# EAGLE board main_board (EAGLE 9.5.2)
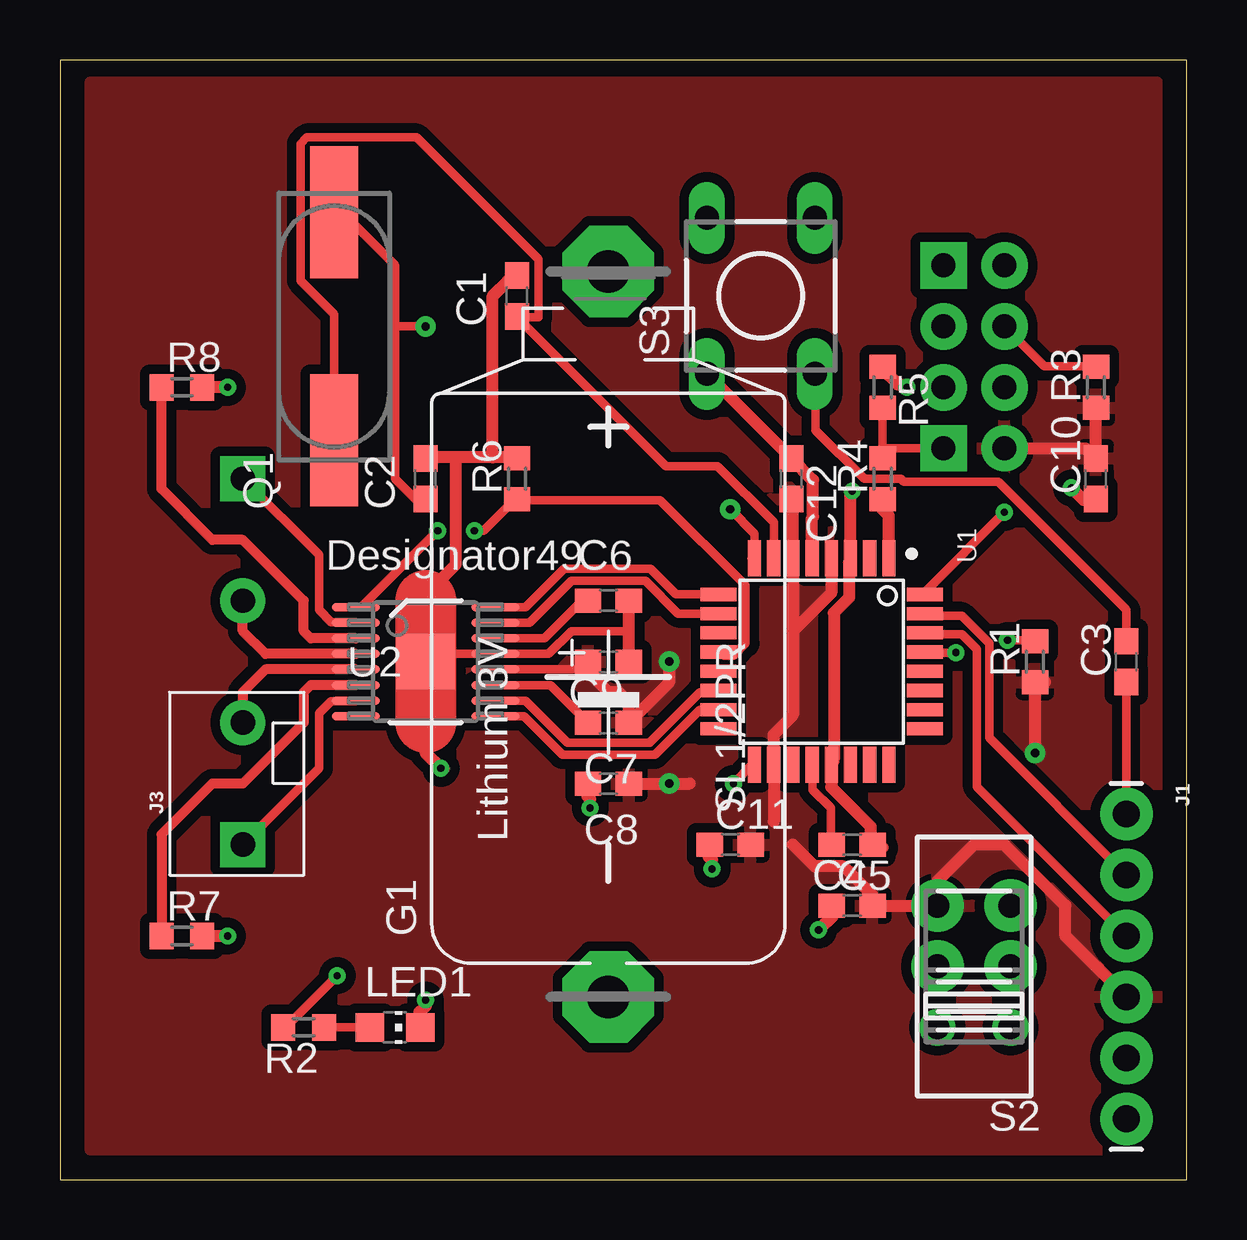
[diagram p0: board, top side]
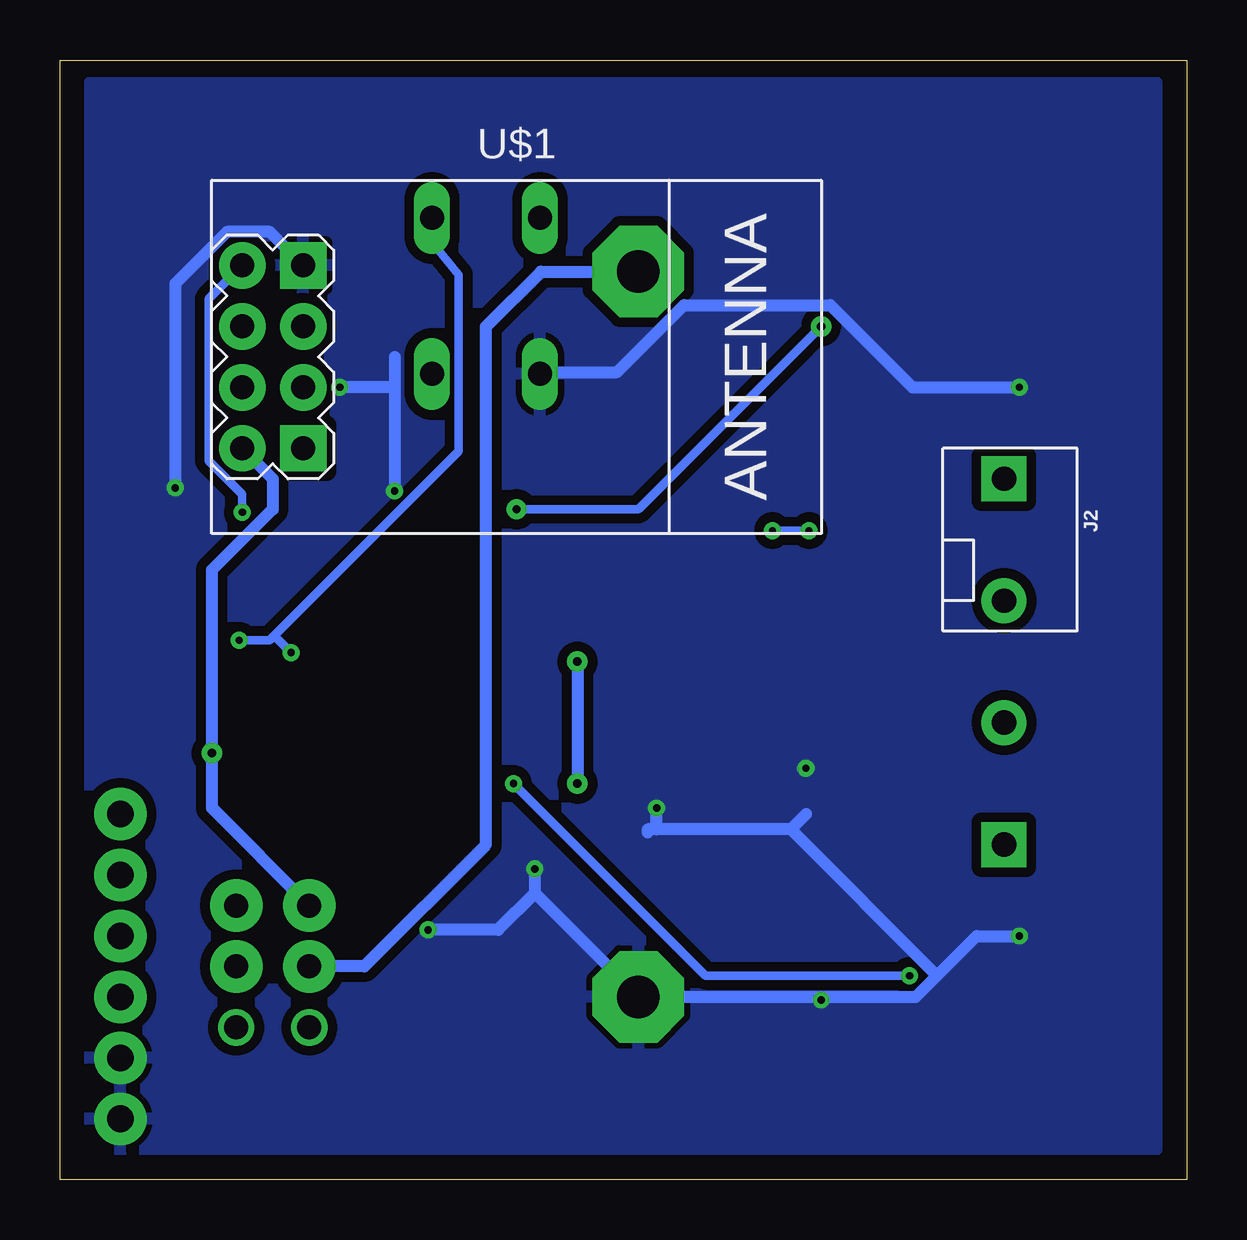
[diagram p1: board, bottom side, seen from below]

Size 46.97 x 46.66 mm. Coordinates in mm from the lower left corner, seen from the top.
Outline: 0,0 46.97,0 46.97,46.66 0,46.66 0,0
Copper layers (1*16): Top 0.035mm / dielectric 1.5mm / Bottom 0.035mm
Design rules "default *": minimum track width 12mil, minimum drill 0.3mm, track to track 6mil, track to pad 6mil, pad to pad 6mil, via to via 6mil, smd to smd 6mil, copper to edge 20mil, drill to drill 6mil, minimum pad ring 10mil, minimum via ring 8mil, stop-mask expansion 4mil, vias tented up to drill 0mil, thermal gap 10mil
Net classes: 0 default: width 0.356 mm; 1 GND: width 0.508 mm, clearance 0.076 mm to class 0

## Footprints (pad centres in the part's own frame; a part is rotated, then mirrored left to right if it is on the bottom)
C0603 = smd 1.1 x 1: 1 -0.85,0; 2 0.85,0
SL-150-1/2AA/PR = drill 1.778 pad 3.81 octagon: + 14.986,0; - -15.24,0
1X06_LONGPADS = drill 1.118 pad 2.184: 1 0,0; 2 2.54,0; 3 5.08,0; 4 7.62,0; 5 10.16,0; 6 12.7,0
MOLEX-1X2 = drill 1.016 pad 1.88 square: 1 -2.54,0 | drill 1.016 pad 1.88: 2 2.54,0
CHIP-LED0805 = smd 1.2 x 1.2: A 0,-1.05; C 0,1.05
CSM-7X-DU = smd 5.5 x 2: 1 -4.75,0; 2 4.75,0
R0603 = smd 1 x 1.1: 1 -0.85,0; 2 0.85,0
2P2T = drill 1 pad 1.422: 1.1 -2.54,1.524; 1.2 -2.54,-1.524 | drill 1 pad 2.184: 2.1 0,1.524; 2.2 0,-1.524; 3.1 2.54,1.524; 3.2 2.54,-1.524
DTS-6 = drill 1 long: 1 -3.25,2.25; 2 3.25,2.25; 3 -3.25,-2.25; 4 3.25,-2.25
QFP80P900X900X120-32N = smd 1.5 x 0.55: 1 -4.3,2.8; 2 -4.3,2; 3 -4.3,1.2; 4 -4.3,0.4; 5 -4.3,-0.4; 6 -4.3,-1.2; 7 -4.3,-2; 8 -4.3,-2.8; 17 4.3,-2.8; 18 4.3,-2; 19 4.3,-1.2; 20 4.3,-0.4; 21 4.3,0.4; 22 4.3,1.2; 23 4.3,2; 24 4.3,2.8 | smd 0.55 x 1.5: 9 -2.8,-4.3; 10 -2,-4.3; 11 -1.2,-4.3; 12 -0.4,-4.3; 13 0.4,-4.3; 14 1.2,-4.3; 15 2,-4.3; 16 2.8,-4.3; 25 2.8,4.3; 26 2,4.3; 27 1.2,4.3; 28 0.4,4.3; 29 -0.4,4.3; 30 -1.2,4.3; 31 -2,4.3; 32 -2.8,4.3
PWP0016K_M = smd 2 x 0.35: 1 -2.9,2.275; 2 -2.9,1.625; 3 -2.9,0.975; 4 -2.9,0.325; 5 -2.9,-0.325; 6 -2.9,-0.975; 7 -2.9,-1.625; 8 -2.9,-2.275; 9 2.9,-2.275; 10 2.9,-1.625; 11 2.9,-0.975; 12 2.9,-0.325; 13 2.9,0.325; 14 2.9,0.975; 15 2.9,1.625; 16 2.9,2.275 | smd 2.46 x 2.31: 17 0,0 | smd 0.5 x 0.5: V 0,0.7
WIRELESS-WIFI-ESP-01 = drill 1 pad 1.93 square: A1 -8.89,3.81; D1 -8.89,-3.81 | drill 1 pad 1.93: A2 -11.43,3.81; B1 -8.89,1.27; B2 -11.43,1.27; C1 -8.89,-1.27; C2 -11.43,-1.27; D2 -11.43,-3.81

## Placement (x,y rotation side)
C1  22pF  [C0603]  19.05,36.83 90 top
C2  22pF  [C0603]  15.24,29.21 90 top
C3  0.1uF  [C0603]  44.45,21.59 90 top
C4  0.1uF  [C0603]  33.02,13.97 180 top
C5  10uF  [C0603]  33.02,11.43 0 top
C6  2.2uF  [C0603]  22.86,24.13 0 top
C7  0.01uF  [C0603]  22.86,19.05 180 top
C8  10uF  [C0603]  22.86,16.51 180 top
C9  0.1uF  [C0603]  22.86,21.59 180 top
C10  0.1uF  [C0603]  43.18,29.21 90 top
C11  0.1uF  [C0603]  27.94,13.97 0 top
C12  0.1uF  [C0603]  30.48,29.21 270 top
G1  CR2-KEYSTONE  [SL-150-1/2AA/PR]  22.86,22.86 90 top
J1  [1X06_LONGPADS]  44.45,15.24 270 top
J2  [MOLEX-1X2]  7.62,26.67 270 bottom
J3  [MOLEX-1X2]  7.62,16.51 90 top
LED1  [CHIP-LED0805]  13.97,6.35 270 top
Q1  8M  [CSM-7X-DU]  11.43,35.56 90 top
R1  10K  [R0603]  40.64,21.59 90 top
R2  330  [R0603]  10.16,6.35 180 top
R3  10K  [R0603]  43.18,33.02 90 top
R4  1K  [R0603]  34.29,29.21 90 top
R5  2K  [R0603]  34.29,33.02 270 top
R6  10K  [R0603]  19.05,29.21 90 top
R7  2  [R0603]  5.08,10.16 0 top
R8  2  [R0603]  5.08,33.02 0 top
S2  2P2T  [2P2T]  38.1,8.89 90 top
S3  DTS-6  [DTS-6]  29.21,36.83 90 top
U1  ATMEGA328P-AU  [QFP80P900X900X120-32N]  31.75,21.59 270 top
U2  Value  [PWP0016K_M]  15.24,21.59 0 top
U$1  WIRELESS-WIFI-ESP-01  [WIRELESS-WIFI-ESP-01]  27.94,34.29 0 bottom

## Library data of the parts
C1-C12 = rcl; SPICEPREFIX: C
G1 = battery
J1 = SparkFun-Connectors
J2 J3 = SparkFun-Connectors; SF_ID: PRT-09918
LED1 = led
Q1 = crystal; OC_FARNELL: unknown; OC_NEWARK: unknown
R1-R8 = rcl; SPICEPREFIX: R
S2 = switch
S3 = switch-tact
U1 = ATMEGA328P-AU; AVAILABILITY: Unavailable; DESCRIPTION: Microcontroller Mcu, 8 Bit, Atmega, 20mhz, Tqfp-32; MF: Microchip; MP: ATMEGA328P-AU; PACKAGE: TQFP-32 Microchip; PRICE: None
U2 = drv8833; MANUFACTURER: Texas Instruments; PARTNUMBER: DRV8833CPWPR; REFDES: RefDes; TYPE: TYPE
U$1 = diy-modules

## Nets
DTR: C3.1 J1.1
GND [GND]: C1.2 C2.2 C4.1 C5.1 C6.2 C8.2 C9.1 C10.1 C11.1 C12.1 G1.- J1.5 J1.6 LED1.C R5.1 R6.2 R7.2 R8.2 S3.1 U1.3 U1.5 U1.21 U2.13 U2.17 U$1.A1
N$1: C2.1 Q1.2 U1.8
N$2: C1.1 Q1.1 U1.7
N$3: C3.2 S3.3
N$4: R1.2 S3.4 U1.29
N$5: R3.2 U$1.B2
N$6: R2.2 U1.17
N$7: LED1.A R2.1
N$8: C4.2 U1.20
N$9: U1.32 U$1.A2
N$10: R4.1 U1.1
N$11: R4.2 R5.2 U$1.D1
N$12: C6.1 U2.14
N$13: C7.2 U2.11
N$14 [GND]: G1.+ S2.2.1
N$16: R7.1 U2.6
N$17: R8.1 U2.3
N$19: J2.1 U2.2
N$20: J3.1 U2.7
N$21: J2.2 U2.4
N$22: J3.2 U2.5
PWM1: U1.14 U2.10
PWM2: U1.15 U2.9
PWM3: U1.9 U2.16
PWM4: U1.10 U2.15
RXI: J1.3 U1.30
SLEEP: R6.1 U1.12 U2.1
TXO: J1.2 U1.31
VCC [GND]: C5.2 C7.1 C8.1 C9.2 C10.2 C11.2 C12.2 J1.4 R1.1 R3.1 S2.3.1 U1.4 U1.6 U1.18 U2.12 U$1.D2

## Tracks (layer width: path | path; a pad name or v marks a point on that pad's centre or on a via)
DTR
  Top 0.356: J1.1 C3.1
GND  (via drill 0.3)
  Top 0.356: 14.52,21.91 U2.13 20.37,21.91 21.32,22.86 23.71,22.86
  Top 0.508: U2.17 14.72,22.11 14.52,21.91 | U2.17 15.28,21.63 15.51,21.63 15.9,22.02 15.9,24.74 | 14.99,6.35 LED1.C 14.99,6.48 14.99,6.99 15.24,7.24 v15.24,7.49 | 15.24,30.1 C2.2 15.37,30.1 16.51,30.1 | 19.05,30.1 R6.2 18.92,30.1 18.03,30.1 | 19.05,37.59 C1.2 | C4.1 33.78,13.97 33.78,14.73 32.15,16.36 U1.21 32.26,17.53 32.26,23.62 32.89,24.26 32.89,25.65 U1.3 32.95,28.63 v33.02,28.7 | 33.66,13.84 C4.1 | 32.26,11.3 C5.1 32.26,11.05 v31.62,10.41 | C1.2 19.01,37.68 | 33.87,13.93 C4.1 | C9.1 23.71,22.86 C6.2 | U2.17 15.24,17.78 v15.88,17.14 15.94,17.08 16,17.14 | U1.5 31.35,27.61 31.39,27.64 31.39,29.15 C12.1 S3.1 | 34.04,13.84 C4.1 | 34.29,13.84 C4.1 | 18.8,37.59 C1.2 | v6.99,10.16 R7.2 | v27.18,12.95 27.18,13.34 27.05,13.46 27.05,13.97 C11.1 | v6.99,33.02 R8.2 | v35.31,33.02 35.18,33.02 35.05,33.15 34.92,33.15 34.29,33.78 R5.1 | v42.16,28.83 42.67,28.32 43.18,28.32 C10.1 | 18.03,30.1 16.51,30.1 | C1.2 18.67,37.47 18.03,36.83 18.03,30.1 | 16.51,30.1 16.51,25.65 16,25.15 15.24,24.13 | v22.1,15.49 22.1,15.88 21.97,16 21.97,16.51 C8.2
  Top 2.54: 15.24,19.05 U2.17 15.24,24.13
  Bottom 0.508: 33.02,34.29 33.02,33.02 | 33.02,33.02 v33.02,28.7 | v6.99,10.16 8.76,10.16 10.41,8.51 | 10.41,8.51 11.3,7.62 15.24,7.62 | 15.24,7.62 G1.- 27.18,11.94 | 27.18,11.94 v27.18,12.95 | v6.99,33.02 11.43,33.02 14.86,36.45 20.95,36.45 23.75,33.66 26.92,33.66 S3.1 | v31.62,10.41 28.7,10.41 27.18,11.94 | 33.02,33.02 v35.31,33.02 | v42.16,28.83 42.16,37.34 40.01,39.5 38.23,39.5 U$1.A1 | v15.24,7.49 15.24,7.62 | 22.48,14.48 22.48,14.61 22.1,14.61 | 16.51,14.61 22.1,14.61 | 10.41,8.51 16.51,14.61 | v15.88,17.14 16,17.14 | 16.51,14.61 15.88,15.24 | 22.1,14.61 v22.1,15.49
  pour Bottom (isolate 0.406): 1.27,45.72 1.27,1.27 45.72,1.27 45.72,45.72
N$1  (via drill 0.35 pad 0.85)
  Top 0.356: 11.43,40.26 Q1.2 11.76,40.31 13.97,38.1 13.97,35.56 | 28.83,25.91 U1.8 28.95,26.93 v27.94,27.94 | C2.1 14.82,28.36 13.97,29.21 13.97,35.56 | v15.24,35.56 13.97,35.56
  Bottom 0.356: v27.94,27.94 22.86,27.94 v15.24,35.56
N$2
  Top 0.356: 19.05,35.94 19.94,35.94 19.94,38.35 14.86,43.43 10.29,43.43 10.03,43.18 10.03,37.47 11.43,36.07 Q1.1 | 19.05,35.94 C1.1 | 29.72,25.91 U1.7 29.75,27.4 27.41,29.73 25.26,29.73 19.05,35.94
N$3
  Top 0.356: C3.2 44.45,23.75 39.12,29.08 35.18,29.08 35.05,29.21 33.53,29.21 31.5,31.24 31.5,33.53 S3.3
N$4  (via drill 0.3)
  Top 0.356: v39.5,22.48 40.64,22.48 R1.2 | v37.34,21.97 36.07,21.97 U1.29
  Bottom 0.356: v39.5,22.48 38.23,22.48 38.04,22.67 | 38.04,22.67 30.35,30.35 30.35,37.72 31.46,39.06 S3.4 | 38.04,22.67 v37.34,21.97
N$5
  Top 0.356: U$1.B2 41.02,33.91 43.18,33.91 R3.2
N$6  (via drill 0.3)
  Top 0.356: v11.56,8.51 9.4,6.35 R2.2 | v28.07,16.51 28.83,17.27 U1.17
  Bottom 0.356: v11.56,8.51 20.07,8.51 v28.07,16.51
N$7
  Top 0.356: LED1.A R2.1
N$8
  Top 0.356: C4.2 32.13,13.97 32.13,15.49 31.37,16.26 31.37,17.27 U1.20
N$9  (via drill 0.3)
  Top 0.356: v39.37,27.81 36.07,24.51 U1.32
  Bottom 0.356: v39.37,27.81 39.37,28.57 40.77,29.97 40.77,36.7 U$1.A2
N$10
  Top 0.356: 34.54,25.91 U1.1
  Top 0.508: U1.1 34.55,27.68 34.29,27.94 R4.1
N$11
  Top 0.356: R5.2 R4.2 34.42,30.48 U$1.D1
N$12
  Top 0.356: C6.1 21.76,24.13 20.2,22.57 U2.14
N$13
  Top 0.356: U2.11 20.45,20.61 C7.2
N$14
  Bottom 0.508: 36.58,9.27 S2.2.1 34.29,8.89 29.21,13.97 29.21,35.56 26.92,37.85 G1.+
N$16
  Top 0.406: U2.6 10.46,20.61 10.16,20.32 10.16,19.05 7.62,16.51 6.35,16.51 4.23,14.39 R7.1
N$17
  Top 0.406: U2.3 10.46,22.57 10.16,22.86 10.16,24.13 7.62,26.67 6.35,26.67 4.23,28.79 R8.1
N$19
  Top 0.356: J2.1 10.79,26.04 10.79,23.75 11.3,23.24 12.32,23.24 U2.2
N$20
  Top 0.356: J3.1 10.79,17.14 10.79,19.43 11.3,19.94 12.32,19.94 U2.7
N$21
  Top 0.406: U2.4 8.56,21.91 7.62,22.86 J2.2
N$22
  Top 0.406: U2.5 8.56,21.27 7.62,20.32 J3.2
PWM1
  Top 0.356: U2.10 19.41,19.96 21.15,18.22 24.59,18.22 24.59,18.24 26.67,20.32 27.38,20.32 U1.14
PWM2
  Top 0.356: U2.9 19.34,19.32 20.94,17.71 24.8,17.71 26.68,19.59 U1.15
PWM3
  Top 0.356: U1.9 25.68,24.39 24.61,25.47 21.01,25.47 19.41,23.86 U2.16
PWM4
  Top 0.356: U1.10 25.77,23.59 24.4,24.96 21.32,24.96 19.58,23.21 U2.15
RXI
  Top 0.356: J1.3 38.23,16.38 38.23,22.1 37.59,22.73 36.07,22.73 U1.30
SLEEP  (via drill 0.3)
  Top 0.356: R6.1 19.05,28.32 25.02,28.32 28.57,24.77 28.57,22.35 28.07,21.84 27.69,21.84 27.56,21.97 U1.12 | 12.45,23.88 U2.1 12.57,23.88 v15.75,27.05 | 18.92,28.32 R6.1 | v17.27,27.05 17.65,27.05 18.8,28.19 R6.1
  Bottom 0.356: v17.27,27.05 v15.75,27.05
TXO
  Top 0.356: J1.2 38.73,18.41 38.73,22.35 37.59,23.5 36.07,23.5 U1.31
VCC  (via drill 0.35 pad 0.85)
  Top 0.356: U2.12 21.68,21.27 C9.2
  Top 0.508: 30.55,22.86 U1.6 30.55,27.87 30.48,28.07 C12.2 | 30.55,22.86 30.55,19.36 29.75,18.56 U1.18 29.75,14.93 | 41.06,20.74 R1.1 v40.64,17.78 | C9.2 22.01,21.17 22.86,20.32 23.28,20.32 23.71,19.89 C7.1 25.4,20.74 v25.4,21.59 | C8.1 v25.4,16.51 26.25,16.51 | U$1.D2 42.76,30.48 C10.2 R3.1 | 30.55,13.97 31.45,13.06 32.66,13.06 33.87,11.85 C5.2 S2.3.1 36.58,12.45 38.1,13.97 39.37,13.97 41.91,11.43 41.91,10.16 J1.4 | U1.4 32.15,24.46 30.55,22.86
  Bottom 0.508: S2.3.1 40.64,15.49 v40.64,17.78 40.64,25.4 38.1,27.94 38.1,29.21 U$1.D2 | v25.4,21.59 v25.4,16.51
  pour Top (isolate 0.406): 1.27,45.72 1.27,1.27 45.72,1.27 45.72,45.72